# Altium PCB PCBDoan2.PcbDoc
Units mm, origin at the board's own origin, x right, y up, seen from the top; angles counter-clockwise.
Board outline 95.25 x 90.8 mm, 2 copper layers (Top Layer, Bottom Layer); 23 components, 42 nets, 137 pads, 4 vias.
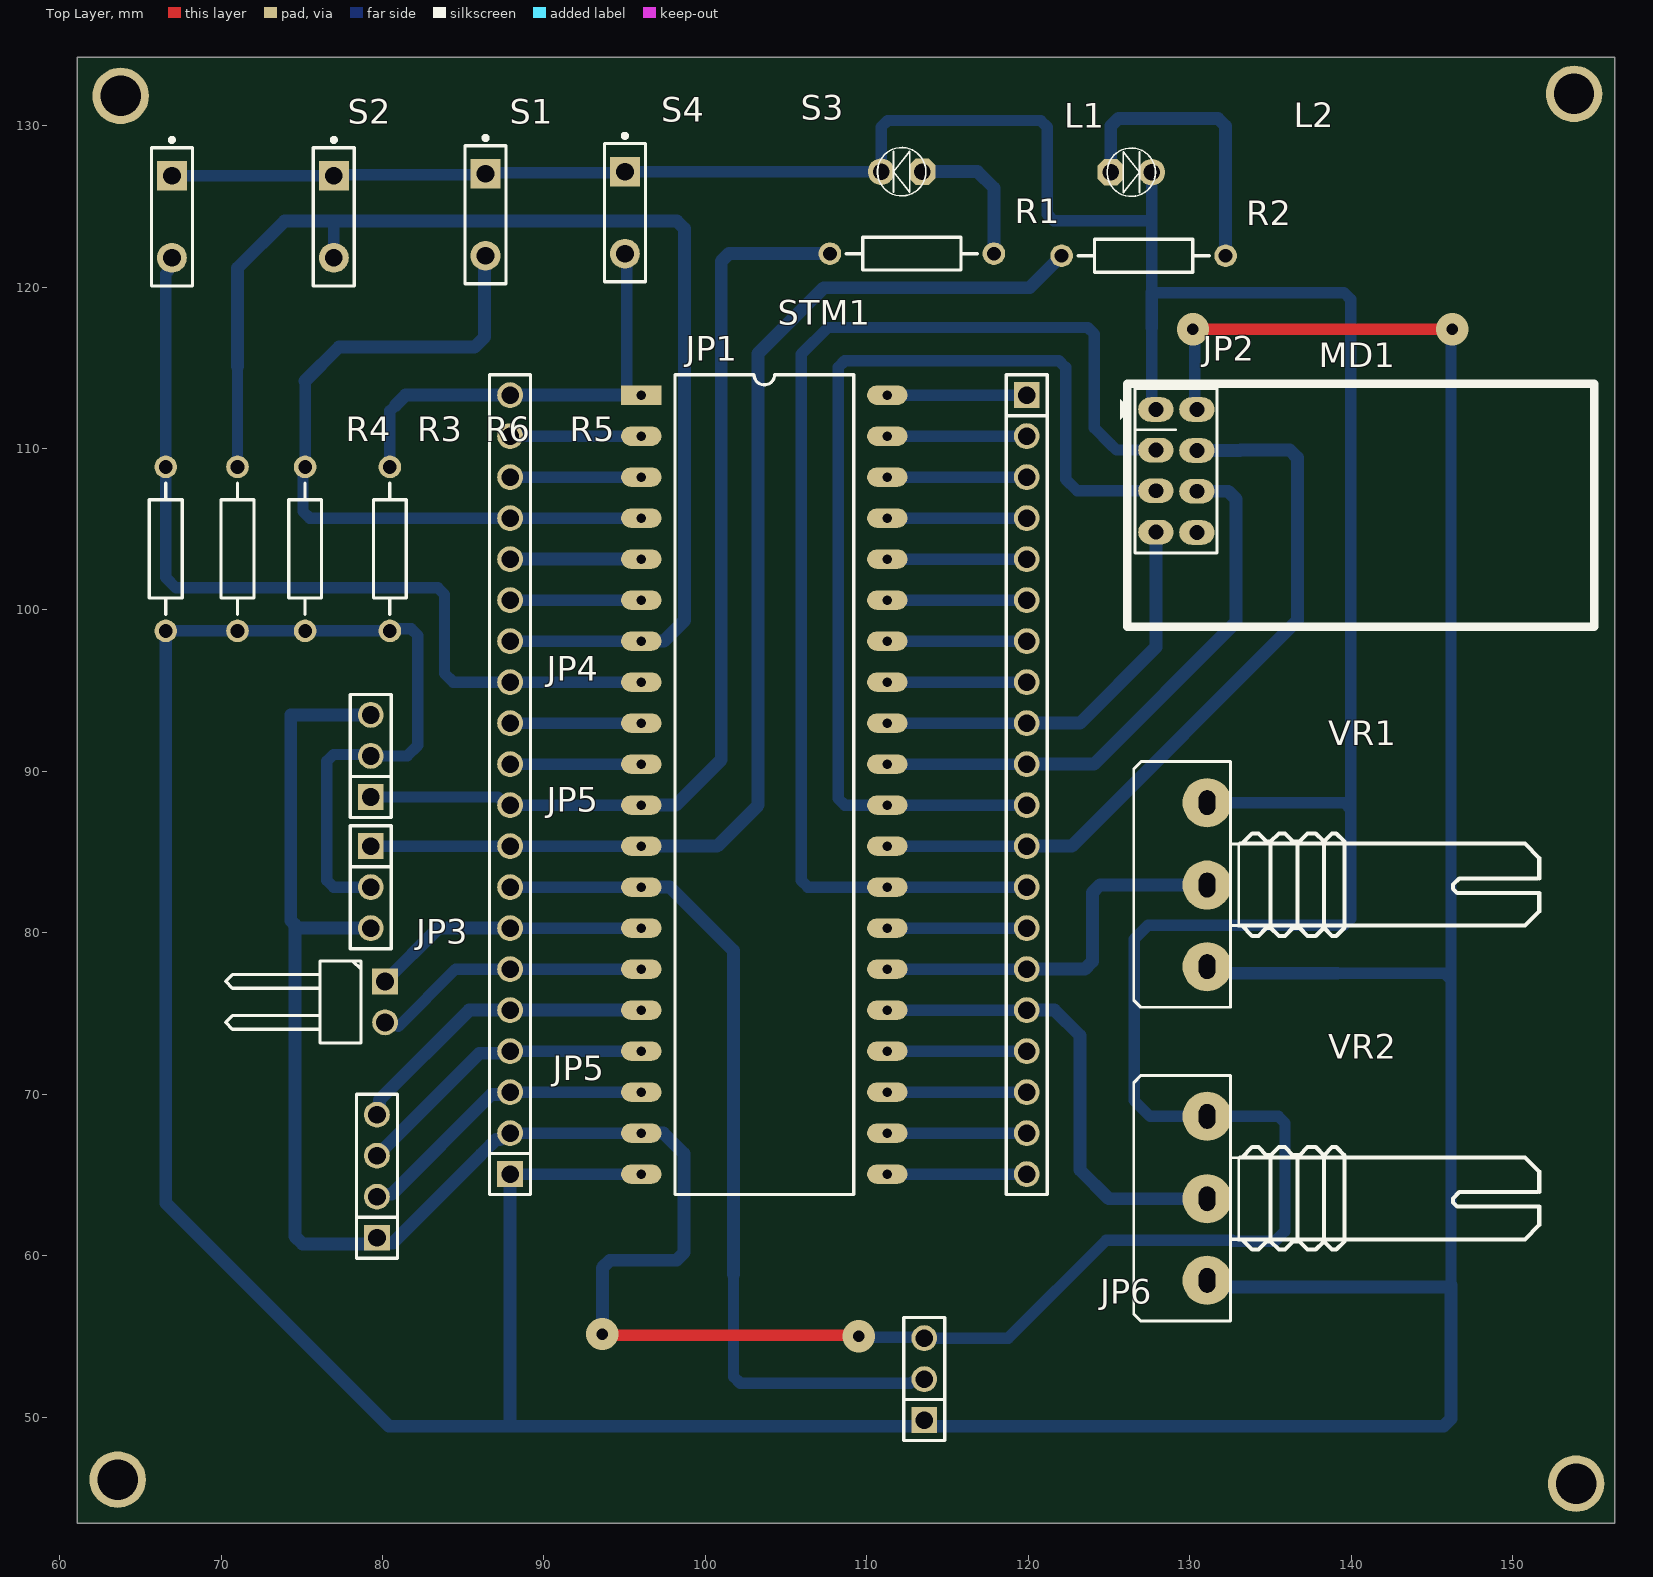
[diagram p0: Top Layer view]
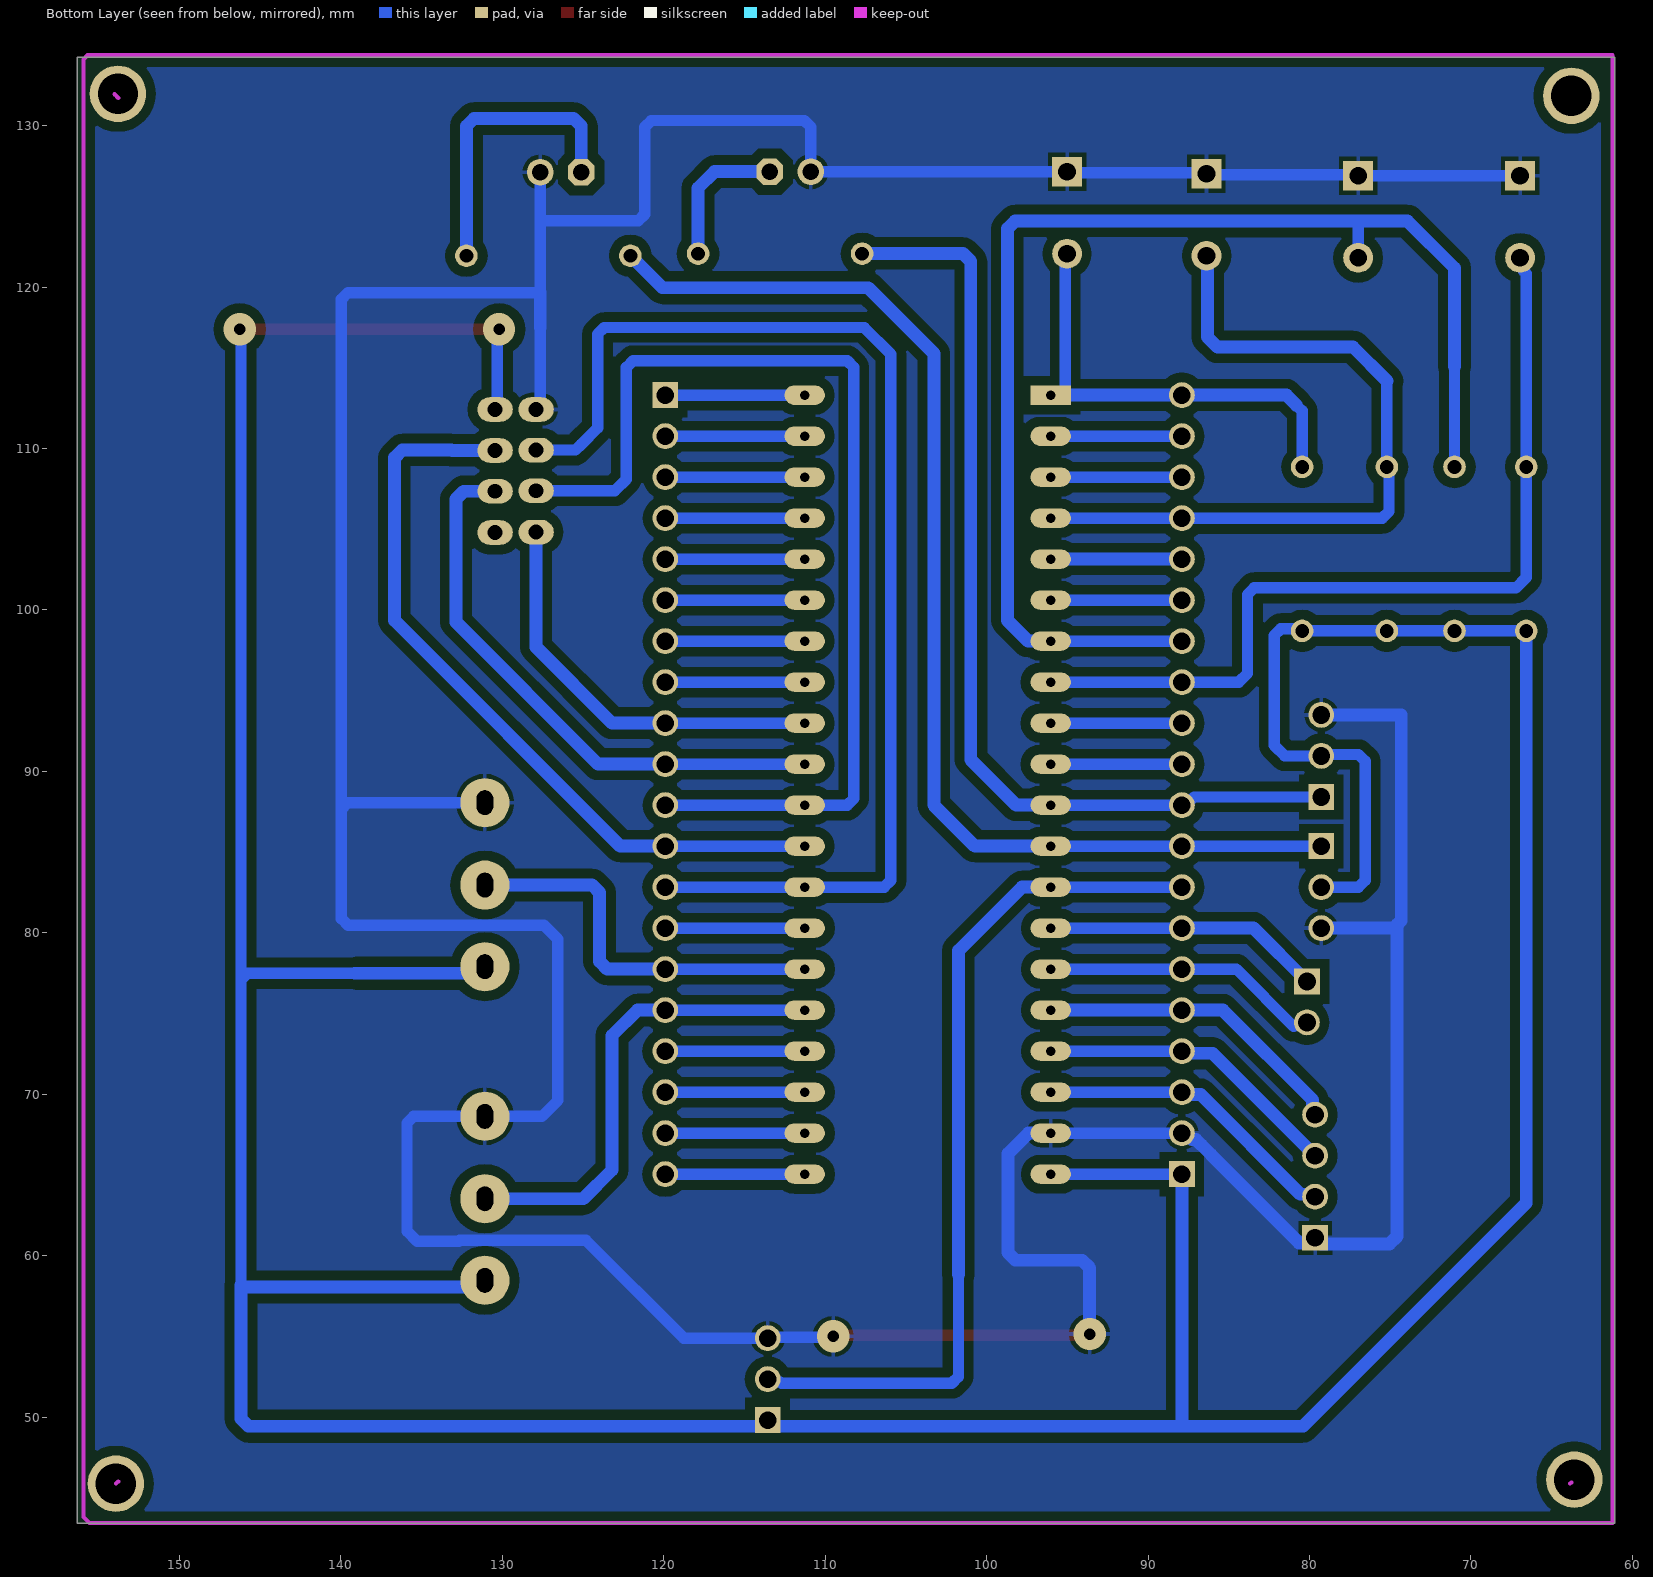
[diagram p1: Bottom Layer view, seen from below]
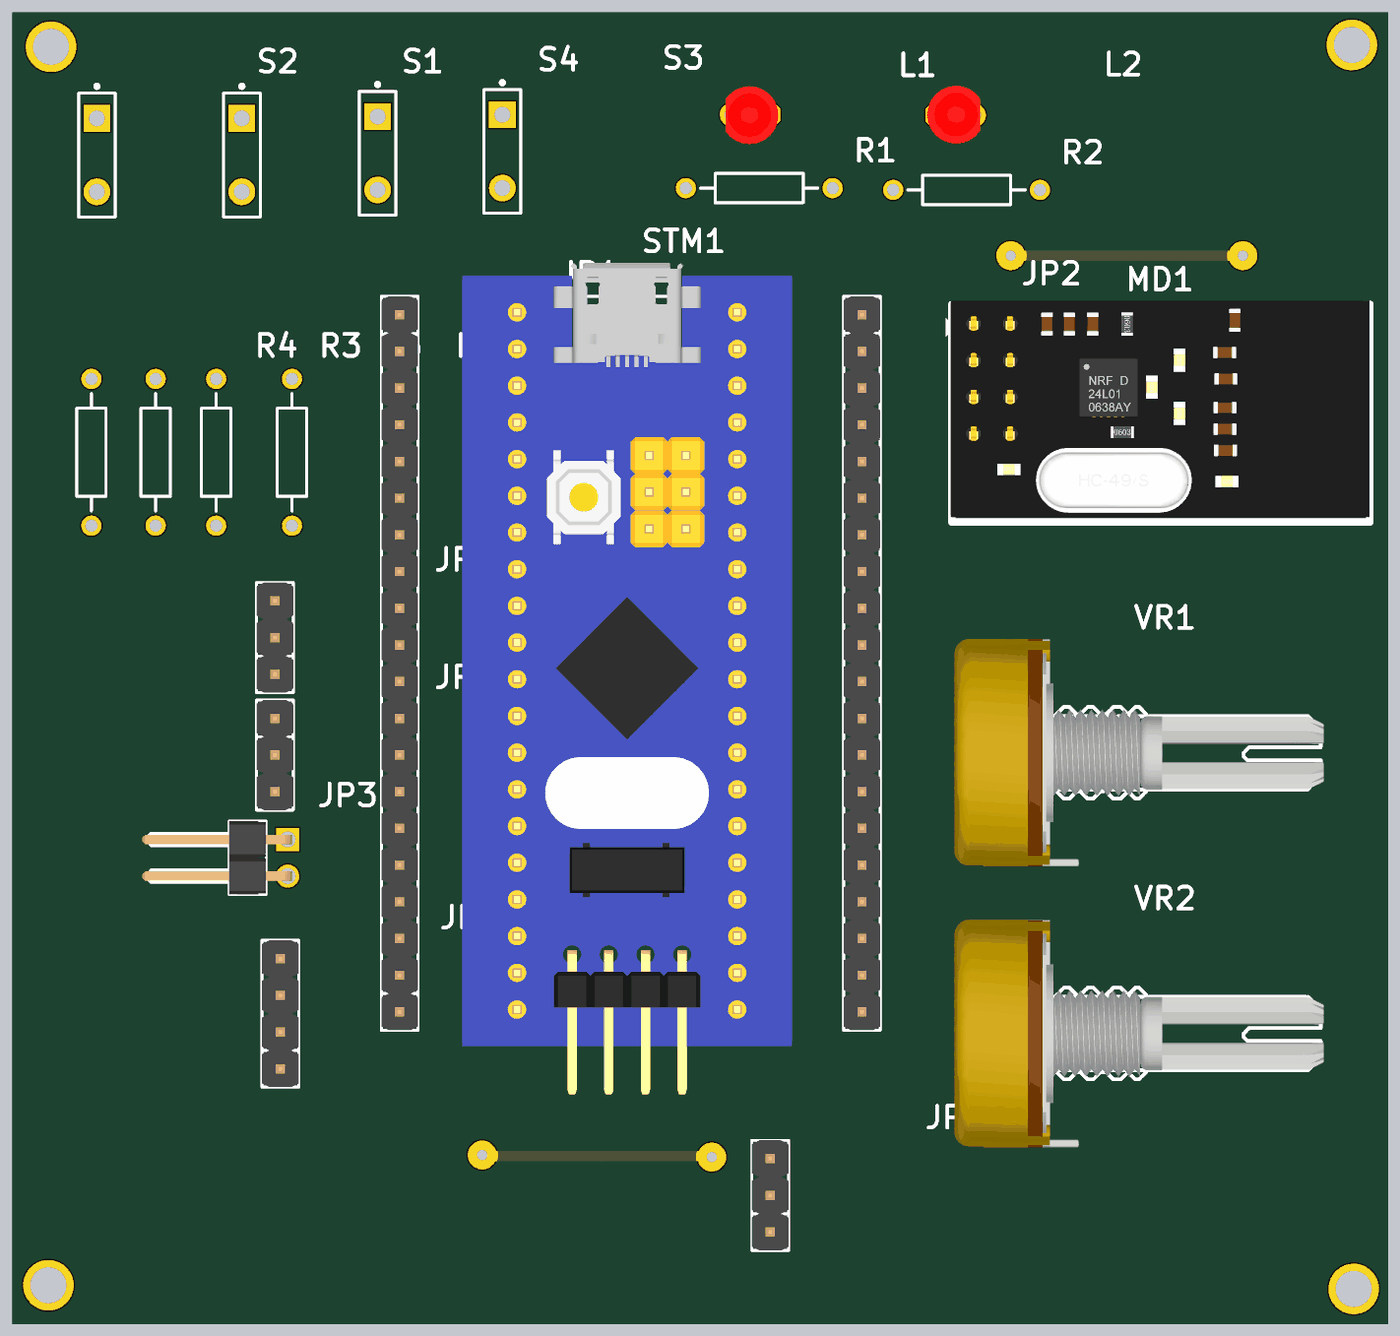
[diagram p2: 3D render of the assembled board from above, using the file's embedded part models]

## Layer stack, top to bottom
Top Solder: solder mask 0.0102, Solder Resist, Dk 3.5
Top Layer: signal copper 0.0356
Dielectric 1: dielectric 0.32, FR-4, Dk 4.8
Bottom Layer: signal copper 0.0356
Bottom Solder: solder mask 0.0102, Solder Resist, Dk 3.5

## Board outline
61.087,43.434 156.337,43.434 156.337,134.239 61.087,134.239

## Design rules (kind name [scope] priority, off if disabled: settings)
Clearance [All] p1: gap=0.6 ignorepadtopadclearanceinfootprint=FALSE
PolygonConnect [All] p1: connectstyle=Relief reliefconductorwidth=0.254 reliefentries=4 polygonreliefangle="90 Angle" airgapwidth=0.254
RoutingVias [All] p1: holewidth=0.711 width=1.27 viastyle="Through Hole" minholewidth=0.711 minwidth=1.27 maxholewidth=0.711 maxwidth=1.27
SolderMaskExpansion [All] p1: expansion=0.102 istentingtop=FALSE
Width [All] p1: maxlimit=1.2 minlimit=0.6 preferedwidth=0.7
30 further rules are at their usual default settings.

## Classes and differential pairs
component class DoAn2Sheet: JP1 JP2 JP3 JP4 JP5 JP6 L1 MD1 R1 R2 R3 R4 R5 R6 S2 STM1 VR1 VR2

## Components (designator, comment, footprint, x,y, rotation, side; value= is the part's Value field where it differs from the comment)
JP1 "JP 1x20 2.54" "JP 1x20 DT" 87.904,65.049 r90 top
JP2 "JP 1x20 2.54" "JP 1x20 DT" 119.908,113.309 r270 top
JP3 "USB UART" "JP 1x2 DC" 80.157,76.987 r270 top
JP4 "SERVO1" "JP 1x3 DT" 79.268,88.417 r90 top
JP5 "SERVO2" "JP 1x3 DT" 79.268,85.369 r270 top
JP5 "LCD I2C" "JP 1x4 DT" 79.649,61.112 r90 top
JP6 "DHT11" "JP 1x3 DT" 113.558,49.809 r90 top
L1 "LED 3mm" LED-3MM-RED 113.431,127.152 r180 top
L2 "LED 3mm" LED-3MM-RED 125.115,127.12 r0 top
MD1 "NRF24L01 Module" NRF24L01 127.909,112.42 r270 top
R1 "470" AXIAL-0.4 112.796,122.072 r0 top value=1K
R2 "470" AXIAL-0.4 127.147,121.945 r0 top value=1K
R3 "" AXIAL-0.4 71.013,103.784 r270 top value=1K
R4 "Res2" AXIAL-0.4 66.568,103.784 r270 top value=1K
R5 "" AXIAL-0.4 80.453,103.784 r270 top value=1K
R6 "Res2" AXIAL-0.4 75.204,103.784 r270 top value=1K
S1 "SW-PB" SPST-2 76.982,124.358 r270 top
S2 "SW-PB" SPST-2 66.949,124.358 r270 top
S3 "SW-PB" SPST-2 95.016,124.612 r270 top
S4 "SW-PB" SPST-2 86.38,124.485 r270 top
STM1 "KIT STM32F103C8T6" "STM32F103 KIT" 96.032,113.309 r0 top
VR1 "10K" "Bien Tro Volume Don" 131.084,77.902 r90 top
VR2 "10K" "Bien Tro Volume Don" 131.084,58.471 r90 top

## Footprints (in the part's own frame and the unit in brackets; to place one, negate y for a bottom-side part, rotate by r counter-clockwise, add the part's x,y. Pads: shape width x height; smd on the part's side, far side on the other; paste and mask are expansions set on the pad)
AXIAL-0.4 [mm] "Axial Device, Thru-Hole; 2 Leads; 0.4 in Pin Spacing"
  round 1.4 hole 0.85: 1(-5.08,0) 2(5.08,0)
  silkscreen extent -4.06,-1.02 4.06,1.02
"Bien Tro Volume Don" [mil] "Volume control single"
  round 120 hole 40 slot 60 at 0 deg: 1(0,0) 2(199,0) 3(400,0)
  silkscreen extent -99,-810 500,179, body extent -110,-818 510,188, height 839
"JP 1x2 DC" [mm] "JP 1x2 DC"
  rect 1.6x1.6 hole 1.1: 1(0,0)
  round 1.6 hole 1.1: 2(2.54,0)
  silkscreen extent -1.27,-9.88 3.81,-1.5, body extent -1.27,-10.06 3.81,0.3, height 2.55
"JP 1x3 DT" [mm]
  rect 1.6x1.6 hole 1.1: 1(0,0)
  round 1.6 hole 1.1: 2(2.54,0) 3(5.08,0)
  silkscreen extent -1.27,-1.27 6.35,1.27, body extent -1.27,-1.27 6.35,1.27, height 8.54
"JP 1x4 DT" [mm] "4 pins, 1 row, straight, gold plating"
  rect 1.6x1.6 hole 1.1: 1(0,0)
  round 1.6 hole 1.1: 2(2.54,0) 3(5.08,0) 4(7.62,0)
  silkscreen extent -1.27,-1.27 8.89,1.27, body extent -1.27,-1.27 8.89,1.27, height 8.54
"JP 1x20 DT" [mm] "20 pins, 1 row, straight, gold plating"
  rect 1.6x1.6 hole 1.1: 1(0,0)
  round 1.6 hole 1.1: 2(2.54,0) 3(5.08,0) 4(7.62,0) 5(10.16,0) 6(12.7,0) 7(15.24,0) 8(17.78,0) 9(20.32,0) 10(22.86,0) 11(25.4,0) 12(27.94,0) 13(30.48,0) 14(33.02,0) 15(35.56,0) 16(38.1,0) 17(40.64,0) 18(43.18,0) 19(45.72,0) 20(48.26,0)
  silkscreen extent -1.27,-1.27 49.53,1.27, body extent -1.27,-1.27 49.53,1.27, height 8.54
LED-3MM-RED [mil]
  oct 65x65 hole 40: 1(0,0)
  round 65 hole 40: 2(100,0)
  silkscreen extent -9,-59 109,59, body extent -27,-77 117,80, height 181
NRF24L01 [mil]
  oval 60x86 hole 36: 1(0,0) 2(0,100) 3(99,0) 4(100,100) 5(198,0) 6(199.5,100) 7(299,0) 8(300,100)
  silkscreen extent -63,-86 530,1069, body extent -73,-74 518,1068, height 588
SPST-2 [mm] "Switch; 2 Leads"
  rect 1.85x1.85 hole 1.1: 1(-2.54,0)
  round 1.85 hole 1.1: 2(2.54,0)
  silkscreen extent -4.89,-1.27 4.28,1.27
"STM32F103 KIT" [mm]
  rect 2.5x1.2 hole 0.6: 1(0,0)
  oval 2.5x1.2 hole 0.6: 2(0,-2.54) 3(0,-5.08) 4(0,-7.62) 5(0,-10.16) 6(0,-12.7) 7(0,-15.24) 8(0,-17.78) 9(0,-20.32) 10(0,-22.86) 11(0,-25.4) 12(0,-27.94) 13(0,-30.48) 14(0,-33.02) 15(0,-35.56) 16(0,-38.1) 17(0,-40.64) 18(0,-43.18) 19(0,-45.72) 20(0,-48.26) 21(15.24,-48.26) 22(15.24,-45.72) 23(15.24,-43.18) 24(15.24,-40.64) 25(15.24,-38.1) 26(15.24,-35.56) 27(15.24,-33.02) 28(15.24,-30.48) 29(15.24,-27.94) 30(15.24,-25.4) 31(15.24,-22.86) 32(15.24,-20.32) 33(15.24,-17.78) 34(15.24,-15.24) 35(15.24,-12.7) 36(15.24,-10.16) 37(15.24,-7.62) 38(15.24,-5.08) 39(15.24,-2.54) 40(15.24,0)
  silkscreen extent 2.08,-49.53 13.16,1.27, body extent -3.81,-53.97 19.05,3.59, height 16.12

## Part data
JP1 JP2: library part "JP 1x20 2.54 Duc Thang", "Cắm", Chung_Loai=Cắm, Don_Vi=Con, Ma_Hang=MH000903, Ten_Linh_Kien="Jump Đơn Đực 2.54MM 1x40P Thẳng 11MM"
JP3: library part "JP 1x2 2.54 Duc Cong", "Cắm", Chung_Loai=Cắm, Don_Vi=Con, Ma_Hang=MH000904, Ten_Linh_Kien="Jump Đơn Đực 2.54MM 1x40P Cong Đứng"
JP4 JP5 JP6: library part "JP 1x3 2.54 Duc Thang", "Cắm", Chung_Loai=Cắm, Don_Vi=Con, Ma_Hang=MH000903, Ten_Linh_Kien="Jump Đơn Đực 2.54MM 1x40P Thẳng 11MM"
JP5: library part "JP 1x4 2.54 Duc Thang", "Cắm", Chung_Loai=Cắm, Don_Vi=Con, Ma_Hang=MH000903, Ten_Linh_Kien="Jump Đơn Đực 2.54MM 1x40P Thẳng 11MM"
L1 L2: library part "LED 3mm Do", "Cắm", Chung_Loai=Cắm, Don_Vi=Con, Ma_Hang=MH003892, Ten_Linh_Kien="Led 3MM Phủ Đỏ (10c)"
R1 R2 R3 R5: library part Res2, "Resistor", LatestRevisionDate=17-Jul-2002, LatestRevisionNote="Re-released for DXP Platform.", PackageDescription="Axial Device, Thru-Hole; 2 Leads; 0.4 in Pin Spacing", PackageReference=AXIAL-0.4, Published=8-Jun-2000, Publisher="Altium Limited"
R4 R6: "Resistor", LatestRevisionDate=17-Jul-2002, LatestRevisionNote="Re-released for DXP Platform.", PackageDescription="Axial Device, Thru-Hole; 2 Leads; 0.4 in Pin Spacing", PackageReference=AXIAL-0.4, Published=8-Jun-2000, Publisher="Altium Limited"
S1 S2 S3 S4: "Switch", LatestRevisionDate=17-Jul-2002, LatestRevisionNote="Re-released for DXP Platform.", PackageDescription="Switch; 2 Leads", PackageReference=SPST-2, Published=24-Mar-1999, Publisher="Altium Limited"
STM1: library part "STM32f103 Bluepill", "KIT STM32F103C8T6 Bluepill"
VR1 VR2: library part "Triet Ap Don 10k", "Cắm", Chung_Loai=Cắm, Don_Vi=Con, Ma_Hang=MH001417, Ten_Linh_Kien="Triết Áp Đơn B10K"

## Free pads (board coordinates)
  round 3.5 hole 2.5: 2(63.594,46.126) 2(63.774,131.851) 2(153.817,131.978) 2(153.944,45.872)

## Via types
v1: diameter 2, hole 0.711, Top Layer to Bottom Layer, 4 vias

## Nets (pads, with @x,y where several pads share a name; then routed paths per layer and width w, separated by ;. In a path a pad name is that pad's centre, name@x,y a point inside that pad or via, vN(x,y) a via of type N, cw(c..) or ccw(c..) an arc to the next point about the centre after c; other vN are vias at no path point)
3.3v: JP1.1 JP4.2 JP5.2@79.268,82.829 JP6.1 MD1.2 R3.2 R4.2 R5.2 R6.2 STM1.20 VR1.1 VR2.1 | length 302.2
  Top Layer w0.7: v1(130.204,117.396) v1(146.275,117.396)
  Bottom Layer w0.7: R4.2 R3.2 R6.2 R5.2 80.58,98.831 81.779,98.831 82.189,98.421 82.189,91.621 81.525,90.957 JP4.2 79.177,91.048 76.96,91.048 76.55,90.638 76.55,83.239 76.96,82.829 JP5.2@79.268,82.829 ; R3.2@71.013,98.958 R3.2@71.147,98.824 ; JP1.1 STM1.20 ; v1(130.204,117.396) 130.327,117.274 130.327,112.543 MD1.2 ; 139.125,77.495 145.787,77.495 146.197,77.085 ; 146.197,58.191 146.197,77.085 ; v1(146.275,117.396) 146.197,117.319 146.197,77.085
  Bottom Layer w0.8: R4.2 66.568,63.266 80.406,49.428 87.904,49.428 ; JP1.1 87.904,49.428 ; VR2.1 131.491,58.064 146.07,58.064 146.197,58.191 146.197,49.897 145.729,49.428 113.939,49.428 JP6.1 113.177,49.428 87.904,49.428 ; VR1.1@132.459,77.495 139.125,77.495
5v: JP1.3 JP5.2@79.649,63.652 STM1.18 | length 19.1
  Bottom Layer w0.7: JP1.3 STM1.18
  Bottom Layer w0.8: JP5.2@79.649,63.652 79.802,63.805 80.564,63.805 86.735,69.976 87.751,69.976 JP1.3
ADC1: JP2.16 STM1.25 VR2.2 | length 29.5
  Bottom Layer w0.7: STM1.25 JP2.16
  Bottom Layer w0.8: JP2.16 121.635,75.209 123.21,73.635 123.21,65.303 124.988,63.525 VR2.2
ADC2: JP2.15 STM1.26 VR1.2 | length 24.5
  Bottom Layer w0.7: STM1.26 JP2.15
  Bottom Layer w0.8: JP2.15 123.504,77.749 123.972,78.218 123.972,82.488 124.441,82.956 VR1.2
CE: JP2.13 MD1.3 STM1.28 | length 76
  Bottom Layer w0.7: JP2.13 STM1.28 106.348,82.829 105.938,83.239 105.938,115.849 107.589,117.5 123.689,117.5 124.099,117.09 124.099,111.277 125.116,110.261 125.471,109.906 MD1.3
CS: JP2.12 MD1.4 STM1.29 | length 47.7
  Bottom Layer w0.7: STM1.29 JP2.12
  Bottom Layer w0.8: JP2.12 122.697,85.369 136.672,99.345 136.672,109.437 136.204,109.906 133.142,109.906 133.116,109.88 MD1.4
DHT_Data: JP1.8 JP6.2 STM1.13 | length 53.9
  Bottom Layer w0.7: JP1.8 STM1.13 ; 101.747,58.821 101.747,52.505 102.157,52.095 112.698,52.095 112.78,52.177 113.386,52.177 JP6.2
  Bottom Layer w0.8: STM1.13 97.81,82.829 101.747,78.892 101.747,58.821
GND: JP1.2 JP4.3 JP5.1@79.649,61.112 JP5.3@79.268,80.289 JP6.3 L1.2 L2.2 MD1.1 S1.1 S2.1 S3.1 S4.1 STM1.19 VR1.3 VR2.3 | length 315.7
  Top Layer w0.7: v1(93.619,55.143) 93.691,55.072 109.439,55.072 v1(109.51,55.001)
  Bottom Layer w0.7: S2.1 S1.1 77.046,126.962 86.317,126.962 S4.1 86.444,127.089 94.953,127.089 S3.1 L1.2 110.891,129.917 111.301,130.327 120.768,130.327 121.178,129.917 121.178,124.514 121.588,124.104 127.655,124.104 ; JP1.2 STM1.19 ; v1(109.51,55.001) 109.566,54.945 113.503,54.945 JP6.3 118.765,54.889 124.821,60.945 132.637,60.945 132.698,60.884 135.275,60.884 135.91,61.519 135.91,68.221 135.5,68.631 VR2.3 127.554,68.631 126.563,69.621 126.563,79.604 127.427,80.467 139.564,80.467 139.974,80.877 139.974,87.652 ; 127.655,117.5 127.655,112.674 MD1.1 ; L2.2 127.655,124.104 ; VR1.3 139.564,88.062 139.974,87.652 ; 127.655,124.104 127.655,119.659 139.564,119.659 139.974,119.249 139.974,87.652
  Bottom Layer w0.8: JP5.3@79.268,80.289 74.784,80.289 74.569,80.504 ; JP4.3 74.315,93.497 74.315,80.758 74.569,80.504 ; JP1.2 87.688,67.589 87.288,67.189 87.037,67.189 86.697,66.849 86.69,66.849 86.104,66.264 86.104,66.256 80.636,60.788 79.973,60.788 79.649,61.112 79.268,60.731 75.038,60.731 74.569,61.2 74.569,80.504 ; v1(93.619,55.143) 93.619,59.247 94.088,59.715 98.214,59.715 98.682,60.184 98.682,66.319 97.412,67.589 STM1.19 ; 127.655,117.5 127.655,119.659
MISO: JP2.9 MD1.7 STM1.32 | length 25.7
  Bottom Layer w0.7: STM1.32 JP2.9
  Bottom Layer w0.8: JP2.9 123.21,92.989 127.909,97.688 MD1.7
MOSI: JP2.10 MD1.6 STM1.31 | length 35.5
  Bottom Layer w0.7: STM1.31 JP2.10
  Bottom Layer w0.8: JP2.10 124.074,90.449 132.862,99.238 132.862,106.884 132.394,107.353 MD1.6
NetJP1_11: JP1.11 STM1.10 | length 8.1
  Bottom Layer w0.7: JP1.11 STM1.10
NetJP1_12: JP1.12 STM1.9 | length 8.1
  Bottom Layer w0.7: JP1.12 STM1.9
NetJP1_15: JP1.15 STM1.6 | length 8.1
  Bottom Layer w0.7: JP1.15 STM1.6
NetJP1_16: JP1.16 STM1.5 | length 8.1
  Bottom Layer w0.8: JP1.16 STM1.5
NetJP1_18: JP1.18 STM1.3 | length 8.1
  Bottom Layer w0.7: JP1.18 STM1.3
NetJP1_19: JP1.19 STM1.2 | length 8.1
  Bottom Layer w0.7: JP1.19 STM1.2
NetJP2_1: JP2.1 STM1.40 | length 8.6
  Bottom Layer w0.7: STM1.40 JP2.1
NetJP2_2: JP2.2 STM1.39 | length 8.6
  Bottom Layer w0.7: STM1.39 JP2.2
NetJP2_3: JP2.3 STM1.38 | length 8.6
  Bottom Layer w0.7: STM1.38 JP2.3
NetJP2_4: JP2.4 STM1.37 | length 8.6
  Bottom Layer w0.7: STM1.37 JP2.4
NetJP2_5: JP2.5 STM1.36 | length 8.6
  Bottom Layer w0.7: STM1.36 JP2.5
NetJP2_6: JP2.6 STM1.35 | length 8.6
  Bottom Layer w0.7: STM1.35 JP2.6
NetJP2_7: JP2.7 STM1.34 | length 8.6
  Bottom Layer w0.7: STM1.34 JP2.7
NetJP2_8: JP2.8 STM1.33 | length 8.6
  Bottom Layer w0.7: STM1.33 JP2.8
NetJP2_14: JP2.14 STM1.27 | length 8.6
  Bottom Layer w0.7: STM1.27 JP2.14
NetJP2_17: JP2.17 STM1.24 | length 8.6
  Bottom Layer w0.7: STM1.24 JP2.17
NetJP2_18: JP2.18 STM1.23 | length 8.6
  Bottom Layer w0.7: STM1.23 JP2.18
NetJP2_19: JP2.19 STM1.22 | length 8.6
  Bottom Layer w0.7: STM1.22 JP2.19
NetJP2_20: JP2.20 STM1.21 | length 8.6
  Bottom Layer w0.7: STM1.21 JP2.20
NetL1_1: L1.1 R1.2 | length 8.9
  Bottom Layer w0.8: L1.1 116.86,127.152 117.876,126.136 R1.2
NetL2_1: L2.1 R2.2 | length 18.4
  Bottom Layer w0.8: L2.1 125.115,129.986 125.584,130.454 131.759,130.454 132.227,129.986 R2.2
PWM1: JP1.10 JP4.1 R1.1 STM1.11 | length 60.9
  Bottom Layer w0.7: JP4.1 87.153,88.417 87.661,87.909 JP1.10 STM1.11
  Bottom Layer w0.8: STM1.11 98.166,87.909 100.985,90.729 100.985,121.604 101.454,122.072 R1.1
PWM2: JP1.9 JP5.1@79.268,85.369 R2.1 STM1.12 | length 74.3
  Bottom Layer w0.7: JP5.1@79.268,85.369 JP1.9 STM1.12
  Bottom Layer w0.8: STM1.12 100.731,85.369 103.271,87.909 103.271,115.9 107.335,119.964 120.086,119.964 R2.1
RX: JP1.6 JP3.2 STM1.15 | length 17.4
  Bottom Layer w0.7: JP3.2 80.329,74.275 80.909,74.275 80.981,74.204 84.526,77.749 JP1.6 STM1.15
SCK: JP2.11 MD1.5 STM1.30 | length 65.8
  Bottom Layer w0.7: JP2.11 STM1.30 108.634,87.909 108.224,88.319 108.224,115.033 108.634,115.443 121.911,115.443 122.321,115.033 122.321,108.102 123.032,107.391 MD1.5
SCL: JP1.5 JP5.4 STM1.16 | length 19.5
  Bottom Layer w0.8: JP5.4 79.802,68.885 79.802,69.647 85.364,75.209 STM1.16
SDA: JP1.4 JP5.3@79.649,66.192 STM1.17 | length 19.1
  Bottom Layer w0.7: JP1.4 STM1.17
  Bottom Layer w0.8: JP5.3@79.649,66.192 79.655,66.192 86,72.538 87.773,72.538 JP1.4
SW1: JP1.14 R3.1 S1.2 STM1.7 | length 79.3
  Bottom Layer w0.7: R3.1 71.013,115.087 ; 76.981,124.104 S1.2 S1.2 ; JP1.14 STM1.7
  Bottom Layer w0.8: 71.013,115.087 71.013,121.183 73.934,124.104 76.981,124.104 98.231,124.104 98.699,123.636 98.699,99.339 97.429,98.069 STM1.7
SW2: JP1.13 R4.1 S2.2 STM1.8 | length 55
  Bottom Layer w0.7: S2.2 66.729,121.598 66.729,120.994 66.568,120.833 R4.1 66.568,102.006 67.203,101.371 83.43,101.371 83.84,100.961 83.84,96.066 84.377,95.529 JP1.13 STM1.8
SW3: JP1.20 R5.1 S3.2 STM1.1 | length 28.4
  Bottom Layer w0.7: R5.1 80.453,112.335 80.792,112.674 ; S3.2 95.132,121.956 95.132,113.559 95.382,113.309 STM1.1
  Bottom Layer w0.8: 80.792,112.674 81.427,113.309 JP1.20 STM1.1@95.382,113.309
SW4: JP1.17 R6.1 S4.2 STM1.4 | length 46.6
  Bottom Layer w0.7: 75.204,114.198 R6.1 75.077,108.737 75.077,106.099 75.487,105.689 JP1.17 STM1.4
  Bottom Layer w0.8: 75.204,114.198 77.3,116.294 85.707,116.294 86.317,116.904 86.317,121.882 S4.2
TX: JP1.7 JP3.1 STM1.14 | length 17.2
  Bottom Layer w0.7: JP1.7 STM1.14
  Bottom Layer w0.8: JP3.1 83.459,80.289 JP1.7
pads on no net: MD1.8

## Polygon pours and split planes (outlines as drawn)
GND on Bottom Layer "GND_L02_P000" (solid, pour order 0): 61.214,134.239 155.829,134.239 155.956,134.366 155.956,43.434 61.214,43.434

## Keep-outs
Bottom Layer:
  lines w0.254: 63.774,45.946 63.848,45.872 ; 153.797,46.02 153.944,45.872 ; 153.797,131.724 154.026,131.953 ; 61.214,43.434 61.214,134.366 155.702,134.366 155.956,134.112 155.956,43.815 155.575,43.434 61.214,43.434